# Altium PCB recepteur.PcbDoc
Units mil, origin at the board's own origin, x right, y up, seen from the top; angles counter-clockwise.
Board outline 1220 x 1235 mil, 4 copper layers (Top Layer, Mid-Layer 1, Mid-Layer 2, Bottom Layer); 23 components, 12 nets, 67 pads, 23 vias.
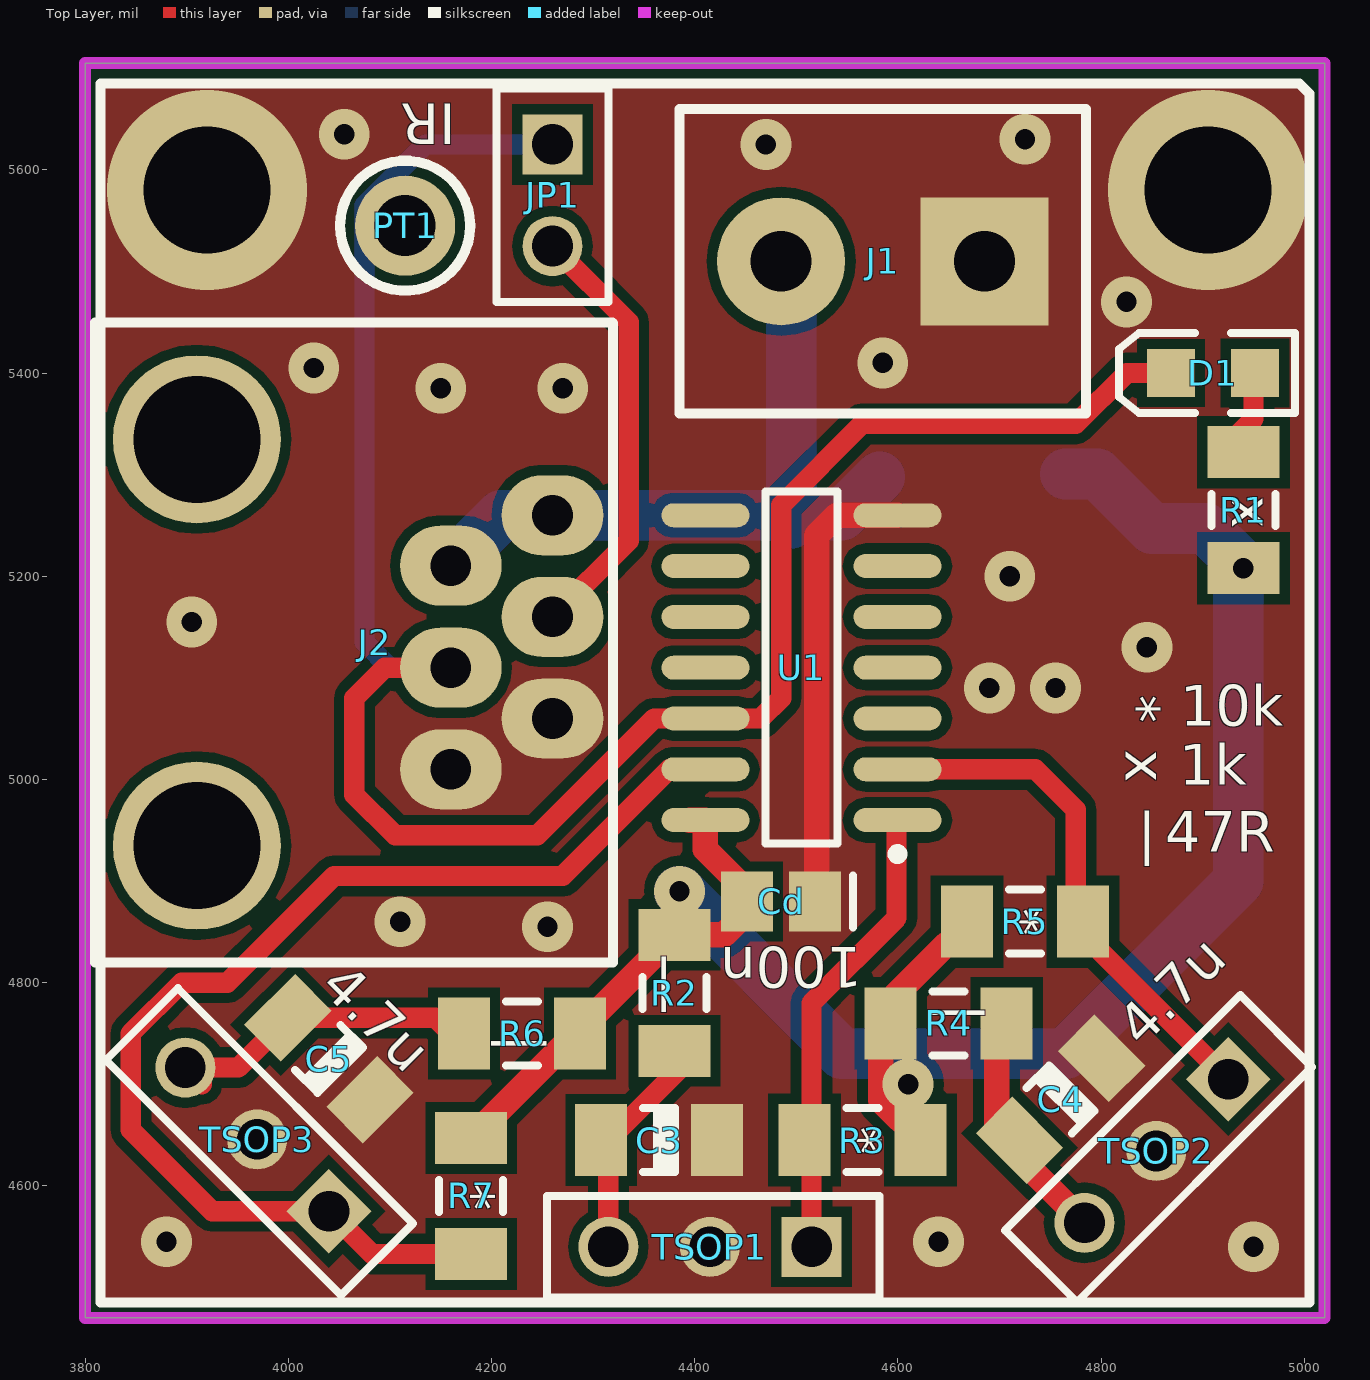
[diagram p0: Top Layer view]
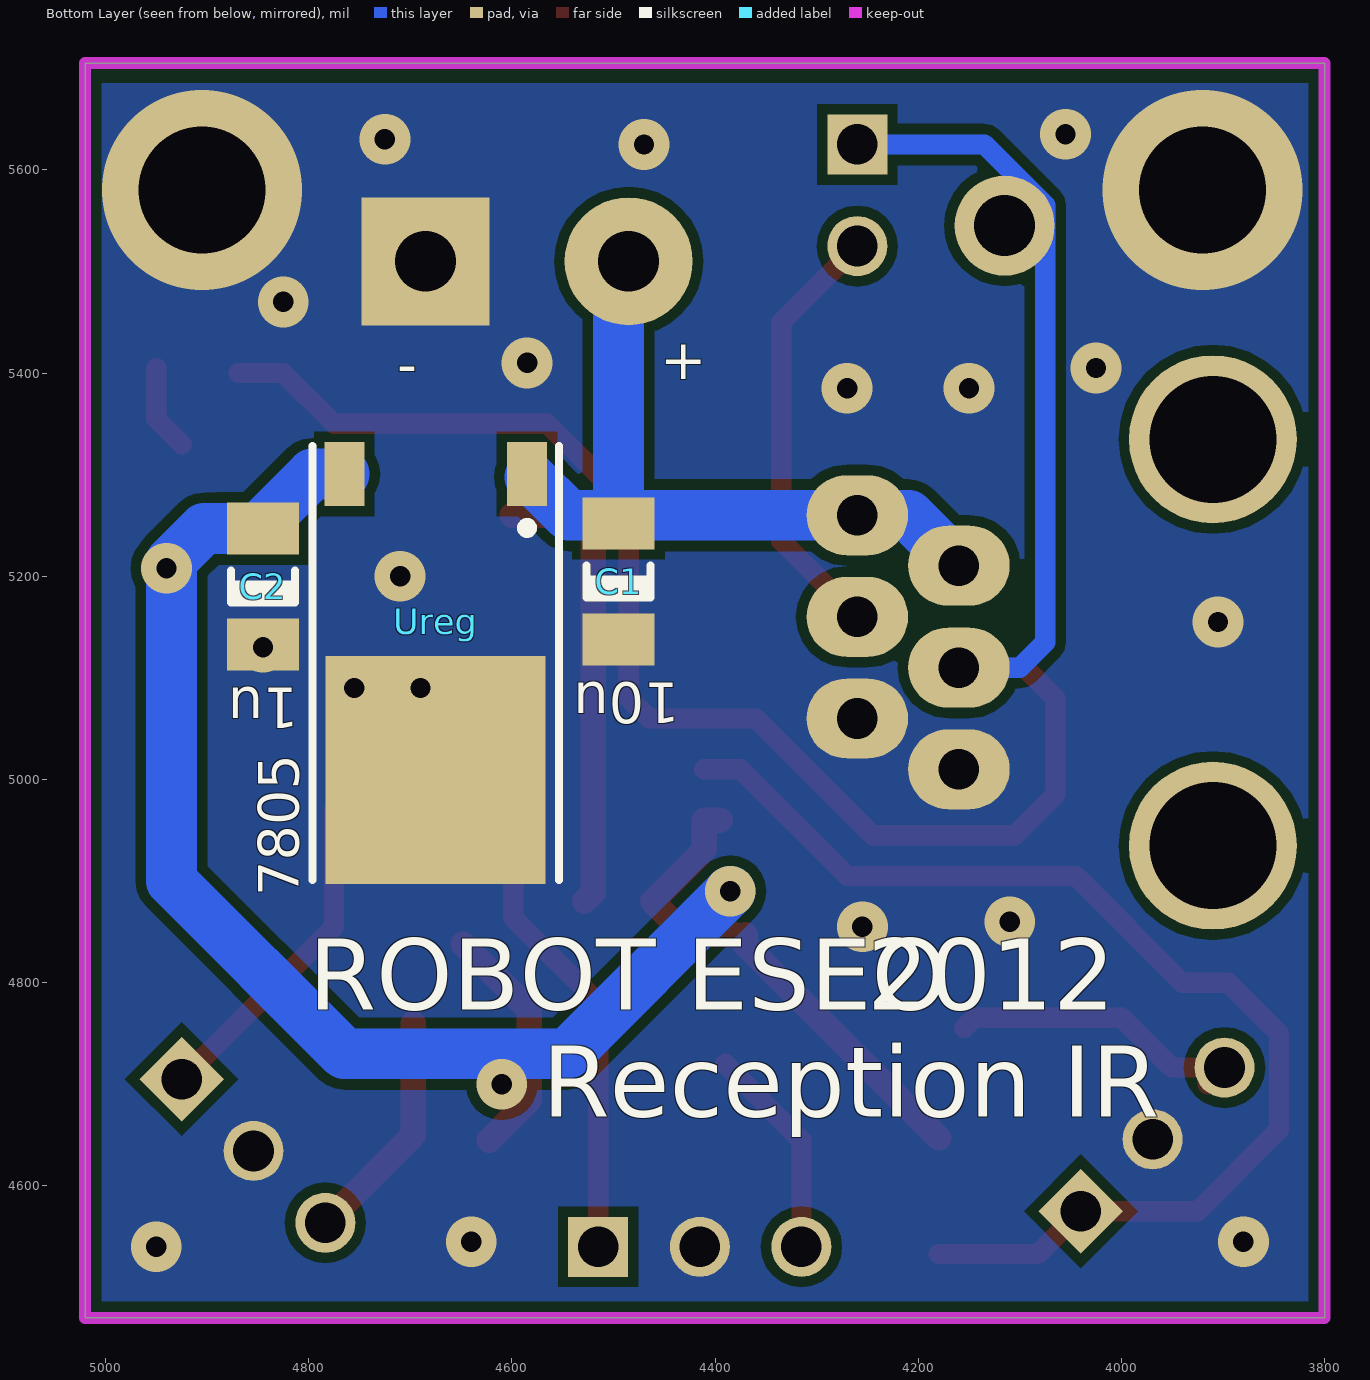
[diagram p1: Bottom Layer view, seen from below]
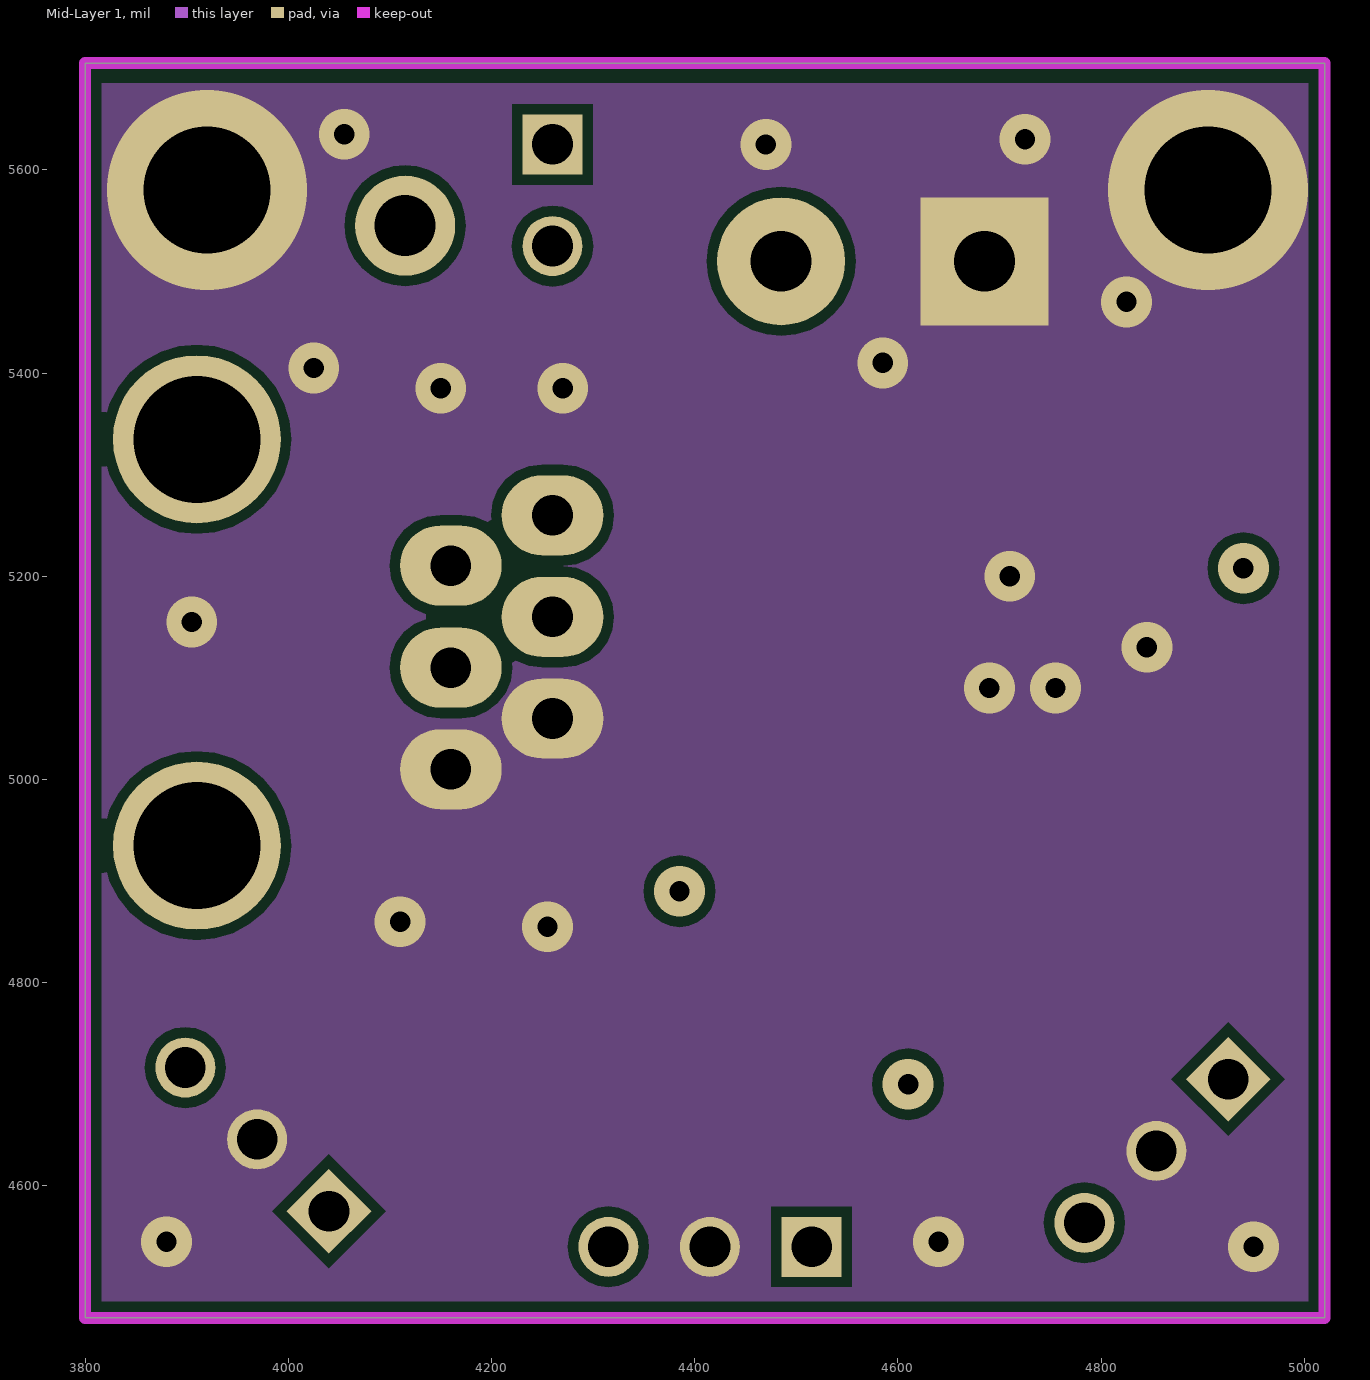
[diagram p2: Mid-Layer 1]
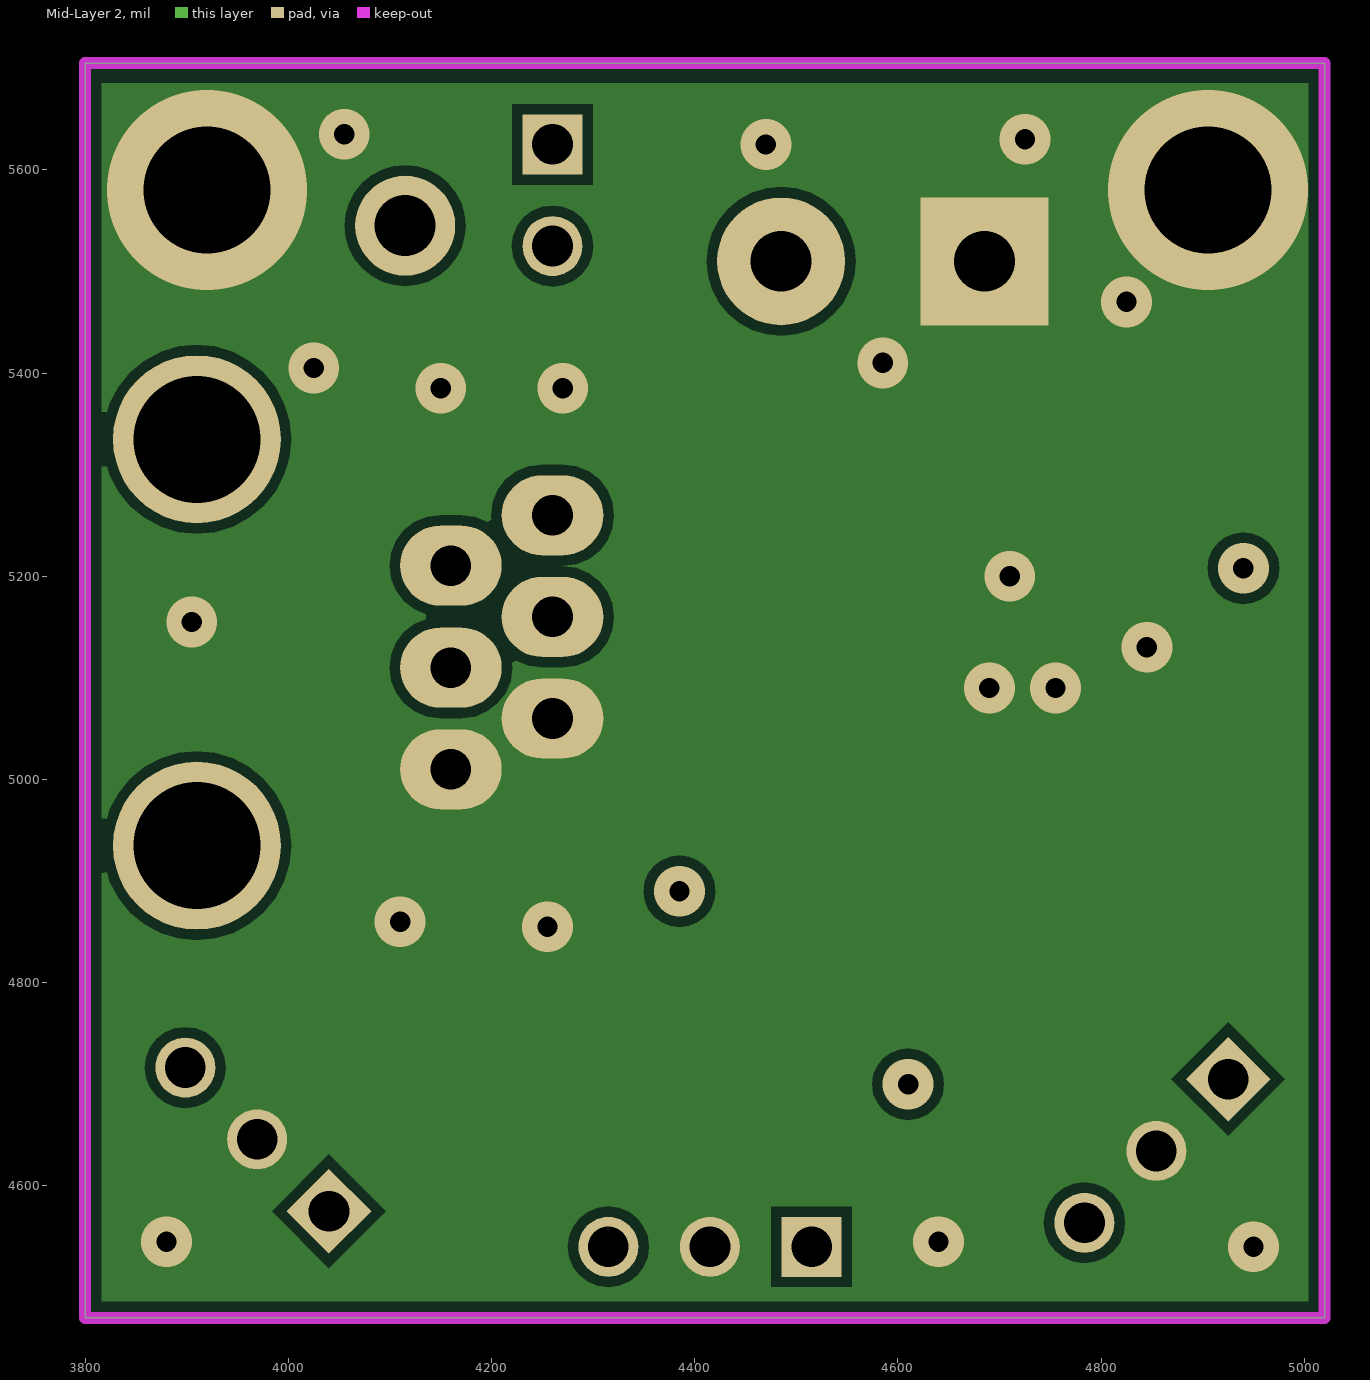
[diagram p3: Mid-Layer 2]
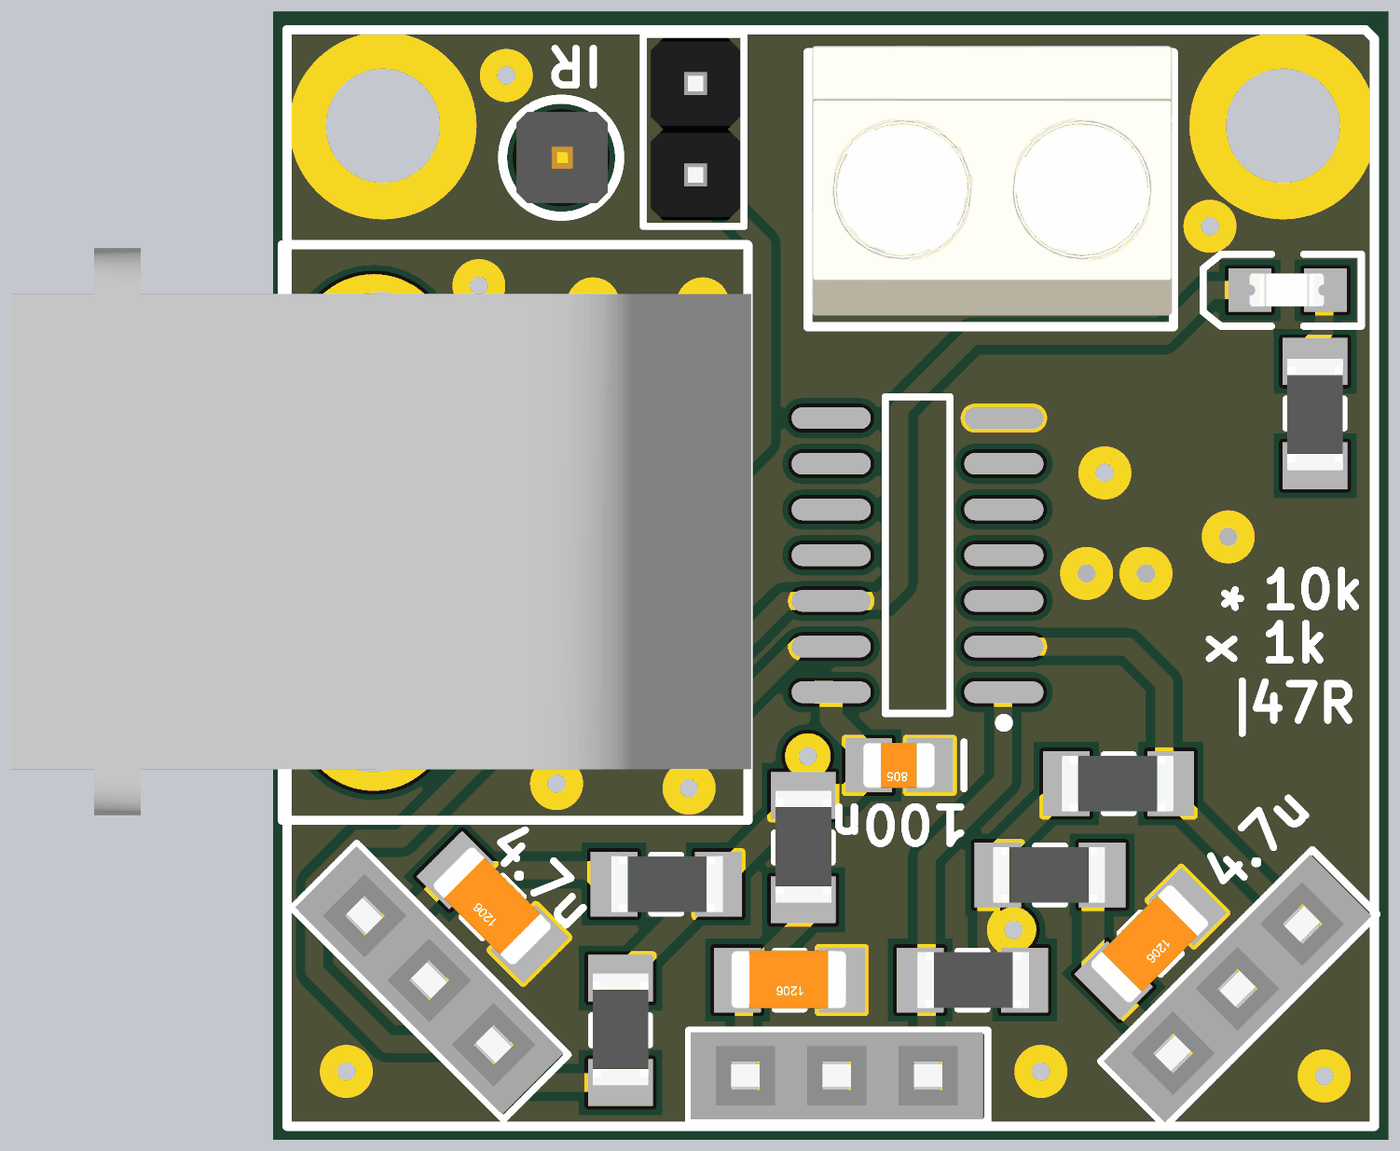
[diagram p4: 3D render of the assembled board from above, using the file's embedded part models]

## Layer stack, top to bottom
Top Layer: signal copper 1.4
Dielectric: core 12.6, FR-4, Dk 4.8
Mid-Layer 1: signal copper 1.4
Dielectric: prepreg 12.6, FR-4, Dk 4.8
Mid-Layer 2: signal copper 1.4
Dielectric: core 12.6, FR-4, Dk 4.8
Bottom Layer: signal copper 1.4

## Board outline
3800,4470 3800,5705 5020,5705 5020,4470

## Design rules (kind name [scope] priority, off if disabled: settings)
Clearance [All] p1: gap=10
ComponentOrientations [All] p1: allowedrotations=32
PlaneConnect [All] p1: planeconnectstyle=Relief reliefexpansion=20 reliefentries=4 reliefconductorwidth=16 reliefairgap=10
PolygonConnect [All] p1: connectstyle=Direct reliefconductorwidth=10 reliefentries=4 polygonreliefangle="90 Angle"
RoomDefinition recepteur [InComponentClass('recepteur')] p1: confinementstyle=ConfineIn formatcopy=TRUE lockcomponents=FALSE outline 0,0 2000,0 2000,1000 0,1000
RoutingLayers [All] p1: top layer_v5=TRUE mid layer 1_v5=FALSE mid layer 2_v5=FALSE bottom layer_v5=TRUE
RoutingVias [All] p1: holewidth=11.81 width=23.62 viastyle="Through Hole" minholewidth=28 minwidth=50 maxholewidth=28 maxwidth=50
SilkscreenOverComponentPads [All] p1: minsilkscreentomaskgap=10
SolderMaskExpansion [All] p1: expansion=4
Width [All] p1: maxlimit=100 minlimit=16 preferedwidth=25
25 further rules are at their usual default settings.

## Components (designator, comment, footprint, x,y, rotation, side; value= is the part's Value field where it differs from the comment)
C1 "C1206_N" C1206_N 4495,5195 r90 bottom
C2 "CMS_0805" C1206_N 4845,5190 r90 bottom
C3 "CMS_0805" C1206_N 4365,4645 r180 top
C4 "CMS_0805" C1206_N 4760,4685 r225 top
C5 "CMS_0805" C1206_N 4040,4725 r135 top
Cd "CMS_0805" C0805_N 4485,4880 r180 top
D1 "LED_0805" LED_0805 4910,5400 r180 top
J1 "BORNIER2" BORNIER2_A_VIS 4685,5510 r180 top
J2 "RJ12_6/6" CONNECTEUR_RJ12_6/6 4260,5060 r180 top
JP1 "JUMPER2" BARRETTE2_MAL_DROIT 4260,5625 r270 top
PT1 "POINT_TEST" POINT_TEST 4115,5545 r0 top
R1 "RES_CMS_1206" R1206_N 4940,5265 r270 top
R2 "RES_CMS_1206" R1206_N 4380,4790 r90 top
R3 "RES_CMS_1206" R1206_N 4565,4645 r0 top
R4 "RES_CMS_1206" R1206_N 4650,4760 r180 top
R5 "RES_CMS_1206" R1206_N 4725,4860 r180 top
R6 "RES_CMS_1206" R1206_N 4230,4750 r0 top
R7 "RES_CMS_1206" R1206_N 4180,4590 r90 top
TSOP1 "Header 3" BARRETTE3_FEM 4515,4540 r180 top
TSOP2 "Header 3" BARRETTE3_FEM 4925,4705 r225 top
TSOP3 "Header 3" BARRETTE3_FEM 4040,4575 r135 top
U1 "74AC11SC" M14A_N 4505,5110 r180 top
Ureg "MC7805BDTG" 369A-13 4675,5155 r0 bottom

## Footprints (in the part's own frame and the unit in brackets; to place one, negate y for a bottom-side part, rotate by r counter-clockwise, add the part's x,y. Pads: shape width x height; smd on the part's side, far side on the other; paste and mask are expansions set on the pad)
369A-13 [mm] "D-PAK/TO-252-AA; 3 Leads (1 Cropped); Body 10.3 (inc. leads) x 6.7 mm (LxW max)"
  rect 1x1.6 smd: 1(-2.285,-3.7) 3(2.285,-3.7)
  rect 5.5x5.7 smd: 4(0,3.7)
  silkscreen extent -3.09,-4.4 3.09,6.45
BARRETTE2_MAL_DROIT [mm] "Connector; 2 Position; Pin Spacing=2.54mm; SIP2"
  rect 1.5x1.5 hole 1.016: 1(0,0)
  round 1.5 hole 1.016: 2(2.54,0)
  silkscreen extent -1.4,-1.4 3.94,1.4, body extent -1.3,-1.2 3.78,1.3, height 8.55
BARRETTE3_FEM [mm] "Connector; Header; 3 Position"
  rect 1.5x1.5 hole 1.016: 1(0,0)
  round 1.5 hole 1.016: 2(2.54,0) 3(5.08,0)
  silkscreen extent -1.7,-1.27 6.61,1.27, body extent -1.56,-1.21 6.56,1.2, height 8.5
BORNIER2_A_VIS [mm] "Connector; Header; 2 Position; screw terminal blocks, Pin Spacing=5.08mm"
  rect 3.2x3.2 hole 1.524: 1(0,0)
  round 3.2 hole 1.524: 2(5.08,0)
  silkscreen extent -2.54,-3.81 7.62,3.81, body extent -2.5,-4 7.5,3.5, height 10
C0805_N [mm] "Chip Capacitor, Body 2.0x1.3mm, IPC Medium Density"
  rect 1.3x1.5 smd: 1(-0.85,0) 2(0.85,0)
  silkscreen extent -1.8,-0.65 -1.8,0.65, body extent -0.99,-0.63 1.01,0.63, height 0.8
C1206_N [mm] "Chip Capacitor, Body 3.2x1.6mm, IPC Medium Density"
  rect 1.3x1.8 smd: 1(-1.45,0) 2(1.45,0)
  silkscreen extent -0.4,-0.8 0.4,0.8, body extent -1.57,-0.81 1.63,0.79, height 1.02
CONNECTEUR_RJ12_6/6 [mm] "Connector; RJ12; 6P/6C; Low Profil; Right Angle; Pin Spacing=2.54mm"
  oval 2.54x2 hole 1.016: 1(0,-5.08) 2(2.54,-3.82) 3(0,-2.54) 4(2.54,-1.27) 5(0,0) 6(2.54,1.27)
  round 4.2 hole 3.175: FIX1(8.89,3.18) FIX2(8.89,-6.98)
  silkscreen extent -1.51,-9.9 11.43,6.1, body extent -1.6,-9.8 18.97,5.95, height 16
LED_0805 [mm] "SM LED; 2 Flat Leads"
  rect 1.2x1.2 smd: 1(-1.05,0) 2(1.05,0)
  silkscreen extent -2.05,-1 2.35,1, body extent -1.05,-0.64 1.06,0.64, height 1.2
M14A_N [mm] "SOIC, 14-Leads, Body 8.6x3.9mm, Pitch 1.27mm, IPC Medium Density"
  oval 2.2x0.6 smd: 1(-2.4,3.81) 2(-2.4,2.54) 3(-2.4,1.27) 4(-2.4,0) 5(-2.4,-1.27) 6(-2.4,-2.54) 7(-2.4,-3.81) 8(2.4,-3.81) 9(2.4,-2.54) 10(2.4,-1.27) 11(2.4,0) 12(2.4,1.27) 13(2.4,2.54) 14(2.4,3.81)
  silkscreen extent -2.53,-4.4 0.9,4.78, body extent -2,-4.38 2,4.38, height 1.75
POINT_TEST [mm] "Connector; 1 Position; SIP1; Diam=2.5mm"
  round 2.5 hole 1.524: 1(0,0)
  silkscreen extent -1.63,-1.62 1.63,1.62, body extent -1.24,-1.27 1.3,1.27, height 5.94
R1206_N [mm] "Chip Resistor, Body 3.2x1.6mm, IPC Medium Density"
  rect 1.3x1.8 smd: 1(-1.45,0) 2(1.45,0)
  silkscreen extent -0.4,-0.8 0.4,0.8, body extent -1.68,-0.87 1.68,0.87, height 0.71

## Part data
C1 C2 C3 C4 C5 Cd: library part CONDENSATEUR_CMS_0805, "EXEMPLE_CODE FARNELL POUR 10nF : 1414662"
D1: library part LED_CMS_1206, "EXEMPLE_CODE FARNELL LED VERTE : 1519493"
J1: library part BORNIER_A_VIS_2_PLOTS, "CODE ATLANTIQUE COMPOSANTS : KVBE2"
J2: library part CONNECTEUR_RJ12_6/6, "CODE ATLANTIQUE COMPOSANTS : KTRCI62"
JP1 PT1: "CODE ATLANTIQUE COMPOSANTS : K2B40D"
R1 R2 R3 R4 R5 R6 R7: library part RESISTANCE_CMS_1206, "CODE ATLANTIQUE COMPOSANTS POUR 1K : R12061K"
TSOP1 TSOP2 TSOP3: "Header, 3-Pin"
U1: "Triple 3-Input AND Gate, 14-Pin SOIC, Commercial Grade"
Ureg: library part MC7805ACD2T, "Three-Terminal Positive Voltage Regulator"

## Via types
v1: diameter 50, hole 20, Top Layer to Bottom Layer, 21 vias
v2: diameter 196.85, hole 125, Top Layer to Bottom Layer, 2 vias

## Nets (pads, with @x,y where several pads share a name; then routed paths per layer and width w, separated by ;. In a path a pad name is that pad's centre, name@x,y a point inside that pad or via, vN(x,y) a via of type N, cw(c..) or ccw(c..) an arc to the next point about the centre after c; other vN are vias at no path point)
+5V: C2.2 Cd.2 R1.2 R2.2 R3.2 R4.2 R5.2 R6.2 R7.2 U1.14 Ureg.3 | length 1933.8
  Top Layer w25: R7.2 4370,4837.09 R2.2@4370,4847.09 ; R2.2 4428.62,4847.09 4461.54,4880 4410.51,4931.02 U1.14 U1.14@4395,4960 ; R3.2 4582.91,4684.17 4582.91,4760 4582.91,4772.91 R5.2@4647.91,4837.91
  Bottom Layer w50: v1(4385,4890) 4545,4730 4765,4730 4935,4900 4935,5215 4902.91,5247.09 4850,5247.09 4796.42,5300.67 Ureg.3
  other v1: 4610,4700 4940,5207.91
E1: R3.1 TSOP1.1 U1.1 | length 456.8
  Top Layer w20: TSOP1.1 4515,4780 4598.6,4863.6 4598.6,4960.89 U1.1
E2: R5.1 TSOP2.1 U1.2 | length 519.2
  Top Layer w20: U1.2 4735,5010 4775,4970 4775,4855 TSOP2.1
E3: R7.1 TSOP3.1 U1.13 | length 1153.8
  Top Layer w20: R7.1 4082.09,4532.91 TSOP3.1 3925,4575 3845,4655 3845,4750 3895,4800 3940,4800 4045,4905 4270,4905 4375,5010 U1.13
GND: C1.1 C2.1 C3.1 C4.1 C5.1 Cd.1 J1.1 J2.5 J2.6 TSOP1.2 TSOP2.2 TSOP3.2 U1.7 Ureg.4 | length 451.3
  Top Layer w25: Cd.1@4528.46,4880 4520,4888.46 4520,5240 4540,5260 U1.7
  other v1: 4950,4540 3880,4545 4640,4545 4255,4855 4110,4860 4690,5090 4755,5090 4845,5130 3905,5155 4710,5200 4150,5385 4270,5385 4025,5405 4585,5410 4825,5470 4470,5625 4725,5630 4055,5635
  other v2: 3920,5580 4905,5580
IR: D1.2 J2.4 JP1.1 PT1.1 U1.12 | length 2057.6
  Top Layer w20: J2.4 4095,5110 4065,5080 4065,4985 4105,4945 4245,4945 4360,5060 U1.12 4465,5060 4485,5080 4485,5270 4565,5350 4775,5350 4825,5400 D1.2
  Bottom Layer w20: J2.4 4100,5110 4075,5135 4075,5565 4135,5625 JP1.1
NetC3_2: C3.2 R2.1 TSOP1.3 | length 211.1
  Top Layer w20: TSOP1.3 4315,4645 R2.1@4390,4720
NetC4_2: C4.2 R4.1 TSOP2.3 | length 232.2
  Top Layer w25: R4.1@4697.09,4760 4697.09,4650.07 TSOP2.3
NetC5_2: C5.2 R6.1 TSOP3.3 | length 307.3
  Top Layer w20: TSOP3.3@3901.16,4719 TSOP3.3 ; TSOP3.3@3915,4700 TSOP3.3 ; R6.1@4154.63,4755.37 4144.63,4765.37 C5.2 3950.69,4716.42 TSOP3.3
NetD1_1: D1.1 R1.1 | length 85.4
  Top Layer w20: R1.1@4925,5330 4950,5355 D1.1@4950,5405
NetJ2_3: J2.3 JP1.2 | length 427.1
  Top Layer w20: J2.3 4335,5235 4335,5450 JP1.2
VCC: C1.2 J1.2 J2.1 J2.2 Ureg.1 | length 706.2
  Bottom Layer w50: J2.2 4209.61,5260 J2.1 C1.2@4495,5260 ; C1.2 C1.2@4495,5260 ; J1.2@4495,5500 C1.2@4495,5260 ; Ureg.1@4582.09,5297.72 4544.37,5260 C1.2@4495,5260
pads on no net: J2.FIX1 J2.FIX2 U1.3 U1.4 U1.5 U1.6 U1.8 U1.9 U1.10 U1.11

## Polygon pours and split planes (outlines as drawn)
GND on Mid-Layer 1 "1-GND" (solid, remove dead copper, pour order 1000): 3815,5685 5005,5685 5005,4485 3815,4485
GND on Mid-Layer 2 "2-GND" (solid, remove dead copper, pour order 1000): 3815,5685 5005,5685 5005,4485 3815,4485
GND on Bottom Layer "Bottom Layer-GND" (solid, remove dead copper, pour order 1000): 3815,5685 5005,5685 5005,4485 3815,4485
GND on Top Layer "Top Layer-GND" (solid, remove dead copper, pour order 1001): 3815,5685 5000,5685 5005,5680 5005,4485 3815,4485

## Keep-outs
Keep-Out Layer:
  the board outline again, w11.81

## Silkscreen, mask and mechanical layers (free items; w line width, h text height)
Top Overlay:
  lines w10: 3815,4485 3815,5685 4995,5685 5005,5675 5005,4485 3815,4485
  text "IR" at 4165,5665 h40 r180
  text "x" at 4929,5279 h40 r270
  text "*" at 4818,5083 h40 r270
  text "10k" at 4878,5053 h40
  text "x" at 4824,5029 h40 r270
  text "1k" at 4877,4995 h40
  text "47R" at 4863,4929 h40
  text "|" at 4836,4928 h40
  text "*" at 4703,4873 h40 r270
  text "100n" at 4565,4835 h40 r180
  text "|" at 4379,4812 h40 r180
  text "4.7u" at 4030,4795 h40 r315
  text "|" at 4672,4761 h40 r90
  text "|" at 4213,4749 h40 r270
  text "4.7u" at 4840,4735 h40 r45
  text "*" at 4543,4658 h40 r270
  text "*" at 4163,4603 h40 r270
Bottom Overlay:
  text "+" at 4408,5394 h40
  text "-" at 4693,5389 h40
  text "10u" at 4435,5095 h40 r180
  text "1u" at 4810,5090 h40 r180
  text "7805" at 4810,4885 h40 r270
  text "2012" at 4250,4750 h120
  text "ROBOT ESEO" at 4800,4750 h120
  text "Reception IR" at 4570,4645 h120
Drill Drawing:
  text "Drill Drawing." at 7200,3100 h60

## Dimensions
3800,4470 to 3800,5705 on Mechanical 15
3800,4470 to 5020,4470 on Mechanical 15